# EAGLE board fitness_logger (EAGLE 6.4)
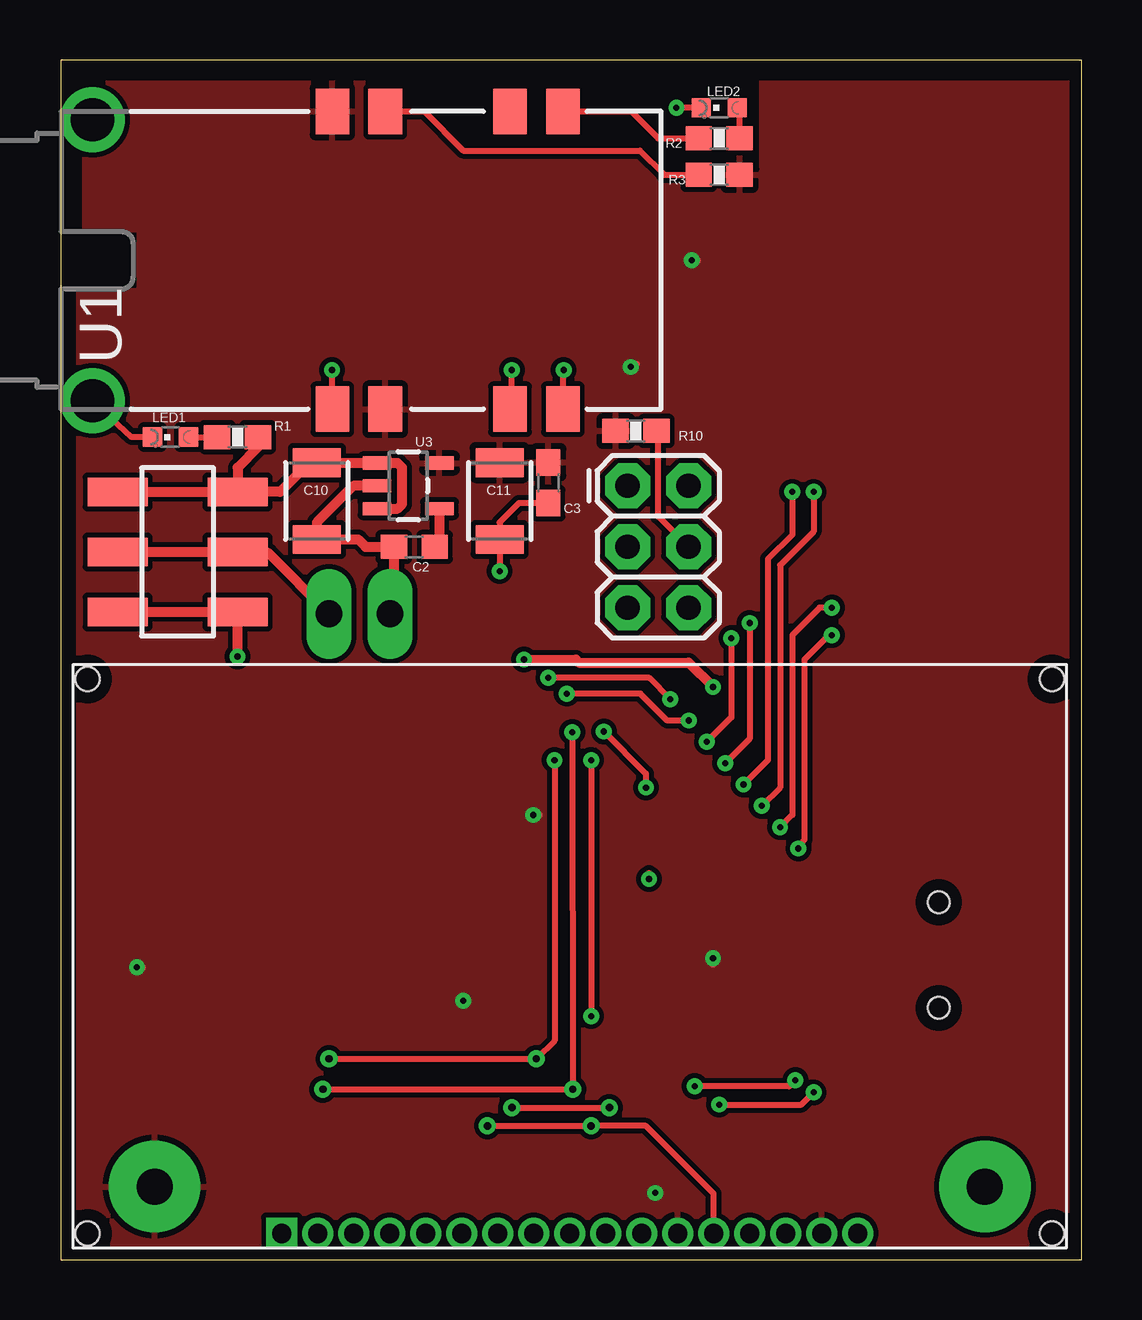
[diagram p0: board, top side]
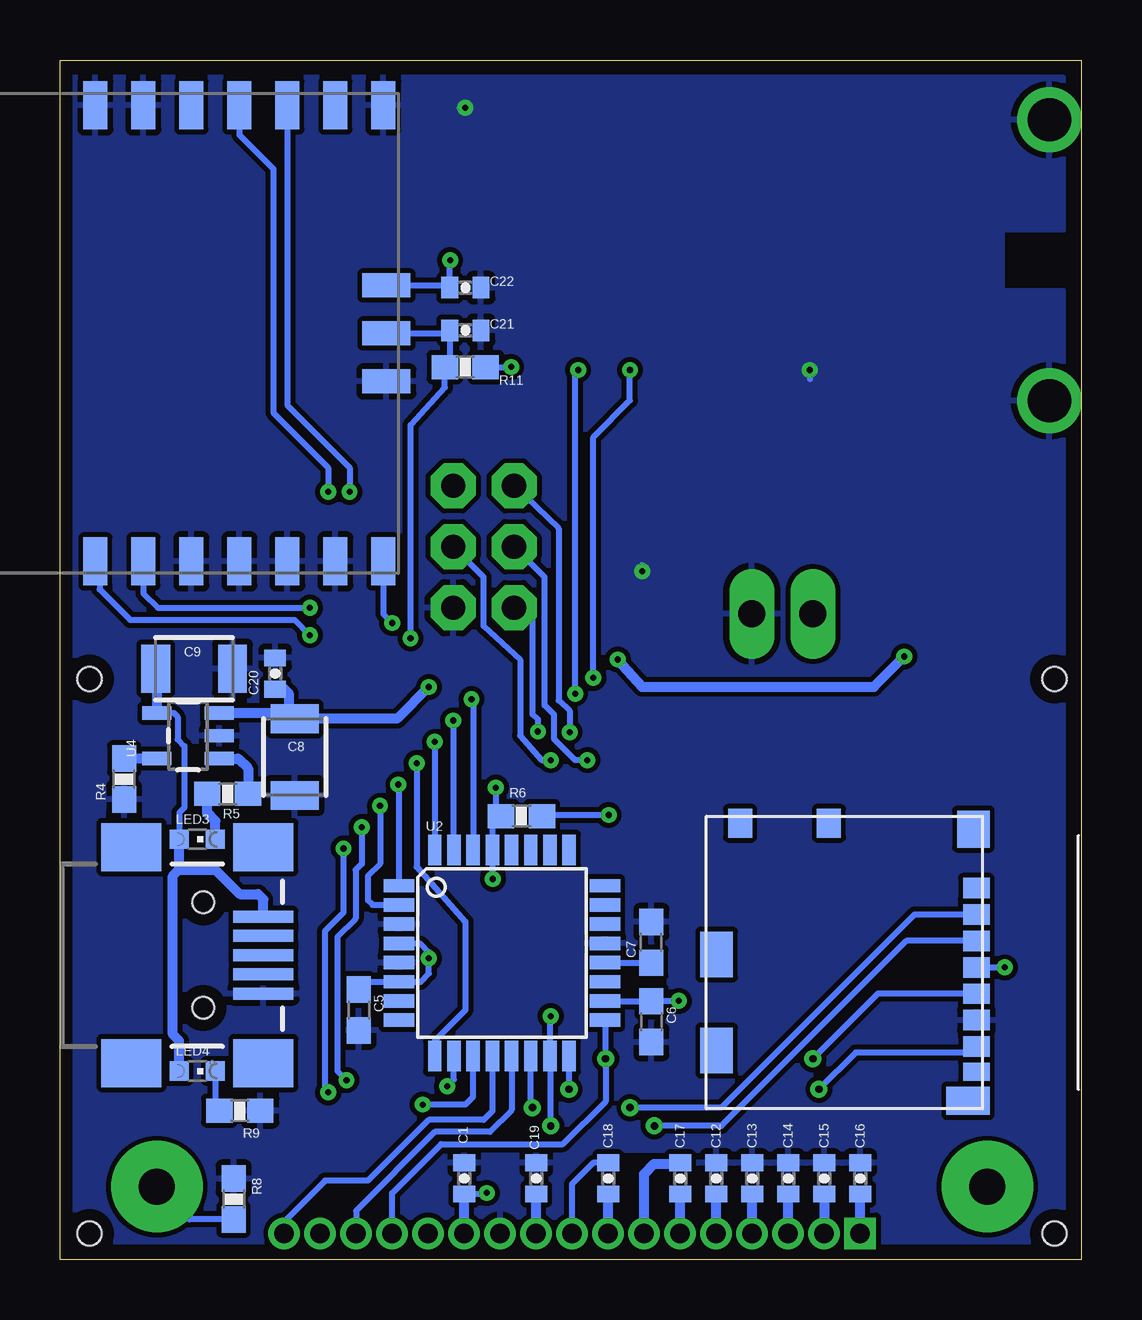
[diagram p1: board, bottom side, seen from below]

Size 42.55 x 50 mm. Coordinates in mm from the lower left corner, seen from the top.
Outline: 0,0 42.55,0 42.55,50 0,50 0,0
Copper layers (1*16): Top 0.035mm / dielectric 1.5mm / Bottom 0.035mm
Design rules "default *": minimum track width 10mil, minimum drill 12mil, track to track 8mil, track to pad 8mil, pad to pad 8mil, via to via 8mil, smd to smd 8mil, copper to edge 20mil, drill to drill 8mil, minimum pad ring 10mil, minimum via ring 8mil, stop-mask expansion 4mil, vias tented up to drill 0mil, thermal gap 10mil
tRestrict: 1 lines
bRestrict: 2 lines

## Footprints (pad centres in the part's own frame; a part is rotated, then mirrored left to right if it is on the bottom)
0402-CAP = smd 0.7 x 0.9: 1 -0.65,0; 2 0.65,0
C0603 = smd 1.1 x 1: 1 -0.85,0; 2 0.85,0
1210 = smd 1.2 x 2: 1 -1.6,0; 2 1.6,0
1X02_LONGPADS = drill 1.118 pad 1.88 long: 1 0,0; 2 2.54,0
CHIPLED_0603 = smd 0.8 x 0.8: A 0,-0.75; C 0,0.75
2X3 = drill 1.016 pad 1.88 octagon: 1 0,0; 2 0,2.54; 3 2.54,0; 4 2.54,2.54; 5 5.08,0; 6 5.08,2.54
0603-RES = smd 1.1 x 1: 1 -0.85,0; 2 0.85,0
LS20126 = smd 1.9 x 1.4: 1 -6.2,13.7; 2 -6.2,11.5; 3 -6.2,6.3; 4 -6.2,4.1; 5 6.2,4.1; 6 6.2,6.3; 7 6.2,11.5; 8 6.2,13.7 | drill 1.8: 9 5.85,23.7; 10 -5.85,23.7
TQFP32-08 = smd 1.27 x 0.559: 1 -4.293,2.8; 2 -4.293,2; 3 -4.293,1.2; 4 -4.293,0.4; 5 -4.293,-0.4; 6 -4.293,-1.2; 7 -4.293,-2; 8 -4.293,-2.8; 17 4.293,-2.8; 18 4.293,-2; 19 4.293,-1.2; 20 4.293,-0.4; 21 4.293,0.4; 22 4.293,1.2; 23 4.293,2; 24 4.293,2.8 | smd 0.559 x 1.27: 9 -2.8,-4.293; 10 -2,-4.293; 11 -1.2,-4.293; 12 -0.4,-4.293; 13 0.4,-4.293; 14 1.2,-4.293; 15 2,-4.293; 16 2.8,-4.293; 25 2.8,4.293; 26 2,4.293; 27 1.2,4.293; 28 0.4,4.293; 29 -0.4,4.293; 30 -1.2,4.293; 31 -2,4.293; 32 -2.8,4.293
SOT23-5 = smd 0.55 x 1.2: 1 -0.95,-1.3; 2 0,-1.3; 3 0.95,-1.3; 4 0.95,1.3; 5 -0.95,1.3
USB-MINIB = smd 2.5 x 0.5: D+ 2.5,0; D- 2.5,0.8; GND 2.5,-1.6; ID 2.5,-0.8; VBUS 2.5,1.6 | smd 2.5 x 2: MTN1 -3,4.5; MTN2 2.5,4.5; MTN3 -3,-4.5; MTN4 2.5,-4.5 | hole 0.9: 0,2.2; 0,-2.2
ANTAP281M4IB = smd 1 x 2: 1 2,-0.5; 2 0,-0.5; 3 -2,-0.5 | smd 2 x 1: 4 -9.5,-0.625; 5 -9.5,-2.625; 6 -9.5,-4.625; 7 -9.5,-6.625; 8 -9.5,-8.625; 9 -9.5,-10.625; 10 -9.5,-12.625; 11 9.5,-12.625; 12 9.5,-10.625; 13 9.5,-8.625; 14 9.5,-6.625; 15 9.5,-4.625; 16 9.5,-2.625; 17 9.5,-0.625
NHD-C12832A1Z = drill 0.8 square: P$1 8.7,0.6 | drill 0.8: P$2 10.2,0.6; P$3 11.7,0.6; P$4 13.2,0.6; P$5 14.7,0.6; P$6 16.2,0.6; P$7 17.7,0.6; P$8 19.2,0.6; P$9 20.7,0.6; P$10 22.2,0.6; P$11 23.7,0.6; P$12 25.2,0.6; P$13 26.7,0.6; P$14 28.2,0.6; P$15 29.7,0.6; P$16 31.2,0.6; P$17 32.7,0.6 | drill 1.5 pad 3.81: P$18 38,2.55; P$19 3.4,2.55 | hole 1: 0.6,0.6; 40.8,0.6; 40.8,23.7; 0.6,23.7
MICRO_SD_MOLEX = smd 0.85 x 1.1: 1 0,0.55; 2 -1.1,0.55; 3 -2.2,0.55; 4 -3.3,0.55; 5 -4.4,0.55; 6 -5.5,0.55; 7 -6.6,0.55 | smd 0.75 x 1.1: 8 -7.65,0.55 | smd 1.2 x 1: 13 2.7,6.7; 14 2.7,10.4 | smd 1.17 x 1.8: CASE -8.86,0.9 | smd 1.9 x 1.35: P$9 -2.765,11.375; P$12 -6.765,11.375 | smd 1.55 x 1.35: P$10 2.46,0.675
SPDT-SMD = smd 1.2 x 2.5: 1 0,0; 2 2.5,0; 3 5,0; 4 0,-5; 5 2.5,-5; 6 5,-5

## Placement (x,y rotation side)
C1  0.1uF  [0402-CAP]  25.7,3.4 270 bottom
C2  [C0603]  14.73,29.72 180 top
C3  100nf  [C0603]  20.32,32.38 270 top
C5  100nf  [C0603]  30.1,10.41 270 bottom
C6  100nf  [C0603]  17.91,9.93 270 bottom
C7  100nf  [C0603]  17.91,13.23 90 bottom
C8  [1210]  32.77,20.95 270 bottom
C9  [1210]  36.96,24.64 0 bottom
C10  [1210]  10.67,31.62 270 top
C11  [1210]  18.29,31.62 270 top
C12  0.1uF  [0402-CAP]  15.2,3.4 90 bottom
C13  0.1uF  [0402-CAP]  13.7,3.4 90 bottom
C14  0.1uF  [0402-CAP]  12.2,3.4 90 bottom
C15  0.1uF  [0402-CAP]  10.7,3.4 90 bottom
C16  0.1uF  [0402-CAP]  9.2,3.4 90 bottom
C17  0.1uF  [0402-CAP]  16.7,3.4 90 bottom
C18  0.1uF  [0402-CAP]  19.7,3.4 90 bottom
C19  0.1uF  [0402-CAP]  22.7,3.4 270 bottom
C20  0.1uF  [0402-CAP]  33.58,24.43 90 bottom
C21  0.1uF  [0402-CAP]  25.65,38.73 0 bottom
C22  0.1uF  [0402-CAP]  25.65,40.51 0 bottom
JP2  [1X02_LONGPADS]  13.72,26.92 180 top
LED1  [CHIPLED_0603]  4.57,34.29 90 top
LED2  [CHIPLED_0603]  27.43,48.01 90 top
LED3  [CHIPLED_0603]  36.83,17.53 270 bottom
LED4  [CHIPLED_0603]  36.83,7.87 270 bottom
PRG  AVR_SPI_PRG_6PTH  [2X3]  23.62,32.26 270 top
R1  1k  [0603-RES]  7.37,34.29 0 top
R2  1k  [0603-RES]  27.43,46.74 180 top
R3  1k  [0603-RES]  27.43,45.21 0 top
R4  2K  [0603-RES]  39.88,20.04 90 bottom
R5  1k  [0603-RES]  35.56,19.43 180 bottom
R6  10k  [0603-RES]  23.32,18.5 0 bottom
R8  1k  [0603-RES]  35.31,2.54 270 bottom
R9  1k  [0603-RES]  35.05,6.22 0 bottom
R10  10k  [0603-RES]  23.97,34.54 180 top
R11  1k  [0603-RES]  25.66,37.21 180 bottom
U1  LS20126  [LS20126]  25.02,41.66 90 top
U2  ATMEGA168  [TQFP32-08]  24.13,12.79 0 bottom
U3  V_REG_LDOSMD  [SOT23-5]  14.48,32.26 270 top
U4  MCP73831  [SOT23-5]  37.21,21.84 90 bottom
U$1  USB-MINIB-5PIN  [USB-MINIB]  36.58,12.7 0 bottom
U$2  ANTAP281M4IB  [ANTAP281M4IB]  28.45,38.61 270 bottom
U$3  NHD-C12832A1Z  [NHD-C12832A1Z]  0.51,0.51 0 top
U$4  MICRO_SD  [MICRO_SD_MOLEX]  3.81,15.49 90 bottom
U$5  SPDT  [SPDT-SMD]  7.37,32 270 top

## Library data of the parts
C1 C12-C22 = SparkFun-Capacitors; PROD_ID: CAP-00810
C2 C3 C5-C7 = rcl
C8-C11 = SparkFun-Passives
JP2 U$1 = SparkFun-Connectors
LED1-LED4 = led
PRG R1-R6 R8-R11 U1-U3 = SparkFun
U4 = SparkFun-PowerIC; PROD_ID: IC-09995
U$2 = RF
U$3 = displays
U$4 = connectors
U$5 = switches

## Nets
A0: U2.13 U$3.P$15
ANT_RST: C21.1 R11.2 U2.32 U$2.2
ANT_RTS: U2.9 U$2.17
ANT_RXD: U2.10 U$2.12
ANT_SLEEP: U2.2 U$2.7
ANT_SUSPEND: U2.1 U$2.6
ANT_TXD: U2.11 U$2.11
CS_DISP: U2.12 U$3.P$17
GND: C1.1 C2.2 C3.2 C5.2 C6.2 C7.2 C8.2 C9.2 C10.2 C11.2 C12.2 C13.2 C14.2 C15.2 C16.2 C19.1 C20.2 C21.2 C22.2 JP2.1 LED1.C LED2.C PRG.6 R4.1 R8.1 R9.2 U1.1 U1.9 U1.10 U2.3 U2.5 U2.21 U3.2 U4.2 U$1.GND U$2.1 U$2.4 U$2.9 U$2.10 U$2.13 U$2.14 U$2.15 U$2.16 U$3.P$11 U$4.6
MISO: PRG.1 U2.16 U$4.7
MOSI: PRG.4 R10.1 U2.15 U$3.P$13 U$4.3
N$1: C10.1 R1.2 U3.1 U3.3 U$5.1 U$5.4
N$2: C2.1 U3.4
N$3: LED1.A R1.1
N$4: C9.1 LED3.A LED4.A U4.4 U$1.VBUS
N$5: LED2.A R2.1
N$6: R2.2 U1.5
N$7: JP2.2 U$5.2 U$5.5
N$8: C8.1 C20.1 U4.3 U$5.3 U$5.6
N$9: R3.1 U1.7
N$11: R4.2 U4.5
N$12: C7.1 U2.20
N$13: LED3.C R5.2
N$14: R5.1 U4.1
N$15: C12.1 U$3.P$5
N$16: C13.1 U$3.P$4
N$17: C14.1 U$3.P$3
N$18: C15.1 U$3.P$2
N$19: C16.1 U$3.P$1
N$20: C17.1 U$3.P$6
N$21: C17.2 U$3.P$7
N$22: C19.2 U$3.P$10
N$23: C18.1 U$3.P$8
N$24: R8.2 U$3.P$18
N$25: C18.2 U$3.P$9
N$26: LED4.C R9.1
RESET: PRG.5 R6.1 U2.29
RXD: U1.3 U2.30
SCK: PRG.3 U2.17 U$3.P$14 U$4.5
SS: U2.14 U$4.2
TXD: U1.4 U2.31
VCC: C1.2 C3.1 C5.1 C6.1 C11.1 C22.1 R3.2 R6.2 R10.2 R11.1 U1.2 U1.8 U2.4 U2.6 U2.18 U3.5 U$2.3 U$3.P$12 U$3.P$16 U$3.P$19 U$4.4

## Tracks (layer width: path | path; a pad name or v marks a point on that pad's centre or on a via)
A0
  Bottom 0.254: U2.13 23.73,6.24 24.64,5.33 26.92,5.33 30.21,2.05 U$3.P$15
ANT_RST  (via drill 0.25 pad 0.61)
  Top 0.254: v27.94,25.91 27.94,22.61 v26.92,21.59
  Bottom 0.254: U$2.2 26.43,38.61 C21.1 26.3,37.41 R11.2 26.51,36.35 27.94,34.8 v27.94,25.91 | v26.92,21.59 26.92,17.09 U2.32
ANT_RTS  (via drill 0.25 pad 0.61)
  Top 0.254: v27.69,20.7 28.7,21.72 v28.7,26.54
  Bottom 0.254: U2.9 26.92,9.14 25.65,10.41 25.65,14.1 27.69,16.38 v27.69,20.7 | U$2.17 29.07,26.91 v28.7,26.54
ANT_RXD  (via drill 0.25 pad 0.61)
  Top 0.254: v32.13,27.18 31.62,27.18 30.48,26.04 30.48,18.54 v29.97,18.03 | v30.61,7.49 30.35,7.24 v26.42,7.24
  Bottom 0.254: v26.42,7.24 26.13,7.53 U2.10 | U$2.12 39.07,27.77 38.48,27.18 v32.13,27.18 | v29.97,18.03 29.97,16.51 30.23,16.26 30.23,14.22 30.99,13.46 30.99,7.87 v30.61,7.49
ANT_SLEEP  (via drill 0.25 pad 0.61)
  Top 0.254: v31.37,32 31.37,30.35 29.97,28.96 29.97,19.68 v29.21,18.92
  Bottom 0.254: U$2.7 35.07,46.88 33.66,45.47 33.66,35.31 31.37,33.02 v31.37,32 | v29.21,18.92 29.21,16.51 29.72,16 29.72,14.99 29.52,14.79 U2.2
ANT_SUSPEND  (via drill 0.25 pad 0.61)
  Top 0.254: v30.48,32 30.48,30.23 29.46,29.21 29.46,20.83 v28.45,19.81
  Bottom 0.254: U$2.6 33.07,35.61 30.48,33.02 v30.48,32 | 28.45,15.62 U2.1 28.42,19.79 v28.45,19.81
ANT_TXD  (via drill 0.25 pad 0.61)
  Top 0.254: v32.13,26.04 32,26.04 30.99,25.02 30.99,17.53 v30.73,17.14 | v27.43,6.48 30.86,6.48 v31.37,6.99
  Bottom 0.254: U$2.11 40.89,28.93 40.89,27.94 39.62,26.67 32.77,26.67 v32.13,26.04 | U2.11 25.33,6.8 25.65,6.48 v27.43,6.48 | v31.37,6.99 31.5,7.11 31.5,13.72 30.73,14.48 v30.73,17.14
CS_DISP
  Bottom 0.254: U2.12 24.53,6.2 24.89,5.84 27.18,5.84 29.72,3.3 31.5,3.3 33.21,1.59 U$3.P$17
GND  (via drill 0.25 pad 0.3, 0.25 pad 0.61)
  Top 0.254: LED2.C v25.65,48.01 | LED1.C 2.96,34.29 U1.10 | U1.1 11.32,36.81 v11.3,37.08 | v18.29,28.7 C11.2 18.29,30.73 19.09,31.54 C3.2
  Top 0.406: JP2.1 13.88,27.09 C2.2 12.7,29.72 12.39,30.02 C10.2 10.67,30.73 12.19,32.26 U3.2
  Bottom 0.254: v25.65,48.01 25.91,48.01 | v11.3,37.08 11.3,36.7 | v18.29,28.7 18.29,28.96
  pour Bottom: 0.76,49.28 0.76,42.93 3.3,42.93 3.3,40.39 0.76,40.39 0.76,0.76 42.04,0.76 42.04,49.28
MISO  (via drill 0.25 pad 0.61, 0.3 pad 0.61)
  Top 0.254: v10.92,7.11 v21.34,7.11 v21.31,22 21.31,22.12
  Bottom 0.254: U$4.7 4.62,8.64 9.4,8.64 v10.92,7.11 | v21.34,7.11 v21.33,7.12 U2.16 | PRG.1 21.77,30.48 21.77,23.32 21.31,22.89 v21.31,22
MOSI  (via drill 0.25 pad 0.61, 0.3 pad 0.61)
  Top 0.254: v17.78,5.59 v22.1,5.59 24.38,5.59 27.21,2.76 U$3.P$13 | v22.1,20.83 v22.1,10.16 | PRG.4 24.89,30.99 24.89,34.47 R10.1
  Bottom 0.254: U$4.3 7.28,13.29 14.99,5.59 v17.78,5.59 | v22.1,5.59 22.1,8.47 U2.15 22.13,10.13 v22.1,10.16 | PRG.4 24.89,28.45 24.89,26.42 23.37,25.02 23.37,21.84 22.48,20.83 v22.1,20.83
N$1
  Top 0.406: U$5.4 U$5.1 | R1.2 8.22,33.87 7.37,33.02 U$5.1 | U$5.1 9.14,32 10.36,33.22 C10.1 10.68,33.21 U3.1 14.04,33.21 14.22,33.02 14.22,31.5 14.04,31.31 U3.3
N$2
  Top 0.406: U3.4 15.78,29.91 C2.1
N$3
  Top 0.254: LED1.A R1.1
N$4
  Bottom 0.254: 37.59,17.51 LED3.A 37.57,17.54 37.57,18.64 37.36,18.85 37.36,21.41 37.64,21.69 37.64,22.63 37.8,22.79 U4.4
  Bottom 0.406: U$1.VBUS 34.08,15.03 34.29,15.24 35.05,15.24 36.08,16.27 36.09,16.26 37.59,16.26 | LED4.A 37.58,9.13 37.85,9.4 37.85,16 37.59,16.26 | 37.59,16.26 37.58,16.27 LED3.A | C9.1 38.51,24.59 U4.4
N$5
  Top 0.254: R2.1 28.28,47.91 LED2.A
N$6
  Top 0.254: U1.5 23.77,47.86 24.89,46.74 R2.2
N$7
  Top 0.406: U$5.5 U$5.2 7.41,29.46 8.64,29.46 JP2.2
N$8  (via drill 0.25 pad 0.61)
  Top 0.406: v7.37,25.15 U$5.3 U$5.6 | v27.18,23.88 26.16,24.89 21.59,24.89 21.46,25.02 v19.3,25.02
  Bottom 0.406: U4.3 33.01,22.79 | 33.01,22.79 C8.1 28.5,22.55 v27.18,23.88 | 33.01,22.79 33.01,23.01 33.02,23.02 33.02,23.62 33.18,23.79 C20.1 | v19.3,25.02 18.29,23.88 8.64,23.88 v7.37,25.15
N$9
  Top 0.254: U1.7 15.14,47.86 16.76,46.23 24.13,46.23 25.15,45.21 R3.1
N$11
  Bottom 0.406: U4.5 R4.2
N$12
  Bottom 0.254: U2.20 C7.1
N$13
  Bottom 0.406: LED3.C 36.07,17.54 36.07,18.29 36.41,18.63 R5.2
N$14
  Bottom 0.406: U4.1 35.12,20.89 34.71,20.49 R5.1
N$15
  Bottom 0.406: U$3.P$5 C12.1
N$16
  Bottom 0.406: U$3.P$4 C13.1
N$17
  Bottom 0.406: U$3.P$3 C14.1
N$18
  Bottom 0.406: C15.1 U$3.P$2
N$19
  Bottom 0.406: U$3.P$1 C16.1
N$20
  Bottom 0.406: U$3.P$6 C17.1
N$21
  Bottom 0.406: U$3.P$7 18.21,3.59 17.8,4 16.75,4 C17.2
N$22
  Bottom 0.406: U$3.P$10 C19.2
N$23
  Bottom 0.406: U$3.P$8 C18.1
N$24
  Bottom 0.254: R8.2 37.14,1.69 U$3.P$18
N$25
  Bottom 0.254: C18.2 20.33,4.05 21.21,3.18 U$3.P$9
N$26
  Bottom 0.254: LED4.C 36.08,6.4 R9.1
RESET  (via drill 0.25 pad 0.61)
  Top 0.254: v24.51,15.88 24.51,16.13 | v22.63,22.02 24.38,20.27 v24.38,19.68
  Bottom 0.254: v24.51,15.88 24.53,15.89 U2.29 24.53,18.13 R6.1 24.38,18.71 v24.38,19.68 | PRG.5 22.86,26.67 22.86,22.73 22.63,22.53 v22.63,22.02
RXD  (via drill 0.25 pad 0.61)
  Top 0.254: 18.85,37.03 v18.8,37.08 18.8,35.53 U1.3 | v25.4,23.37 24.51,24.26 v20.32,24.26
  Bottom 0.254: v20.32,24.26 20.32,34.29 18.8,35.81 v18.8,37.08 | v25.4,23.37 25.33,23.17 U2.30
SCK  (via drill 0.25 pad 0.61, 0.3 pad 0.61)
  Top 0.254: v11.18,8.38 v19.81,8.38 20.57,9.14 v20.57,20.83
  Bottom 0.254: U$3.P$14 28.71,2.79 26.67,4.83 21.59,4.83 19.81,6.6 v19.81,8.38 19.81,9.97 U2.17 | U$4.5 8.46,11.09 v11.18,8.38 | PRG.3 22.35,28.45 22.35,23.11 21.97,22.73 21.97,21.72 21.08,20.83 v20.57,20.83
SS  (via drill 0.3 pad 0.61)
  Top 0.254: v18.8,6.35 v22.86,6.35
  Bottom 0.254: U$4.2 6.94,14.39 14.99,6.35 v18.8,6.35 | v22.86,6.35 22.93,6.42 U2.14
TXD  (via drill 0.25 pad 0.61)
  Top 0.254: v20.95,37.08 20.92,37.05 U1.4 | v26.16,22.48 25.27,22.48 24.16,23.6 v21.08,23.6
  Bottom 0.254: U2.31 26.13,22.64 v26.16,22.48 | v21.08,23.6 21.08,36.96 v20.95,37.08
VCC  (via drill 0.25 pad 0.61)
  Top 0.254: v26.29,41.66 26.54,41.66 | v23.75,37.21 23.88,37.21 24,37.34 | v24.77,2.79 24.89,2.79 | v27.18,12.57 27.18,12.32 | v16.76,10.79 16.89,10.79 | v19.68,18.54 19.94,18.54 | v3.17,12.19 3.43,12.19
  Bottom 0.254: U$2.3 26.4,40.61 C22.1 26.3,41.64 v26.29,41.66 | R11.1 v23.75,37.21 | C1.2 24.81,2.75 v24.77,2.79 | U2.4 27.54,13.19 27.18,12.83 v27.18,12.57 27.18,11.94 27.52,11.59 U2.6 29.77,11.59 C5.1 | v16.76,10.79 17.89,10.79 C6.1 19.83,10.78 U2.18 | R6.2 22.42,18.54 v19.68,18.54 | U$4.4 v3.18,12.19 v3.17,12.19
  Bottom 0.406: U$3.P$12 C1.2
  pour Top: 1.02,49.02 42.04,49.02 42.04,0.51 2.79,0.51 2.79,0.51 0.76,0.51 0.76,40.39 3.3,40.39 3.3,42.93 1.02,42.93